# EAGLE board led_driver_v1.1 (EAGLE 6.5.0)
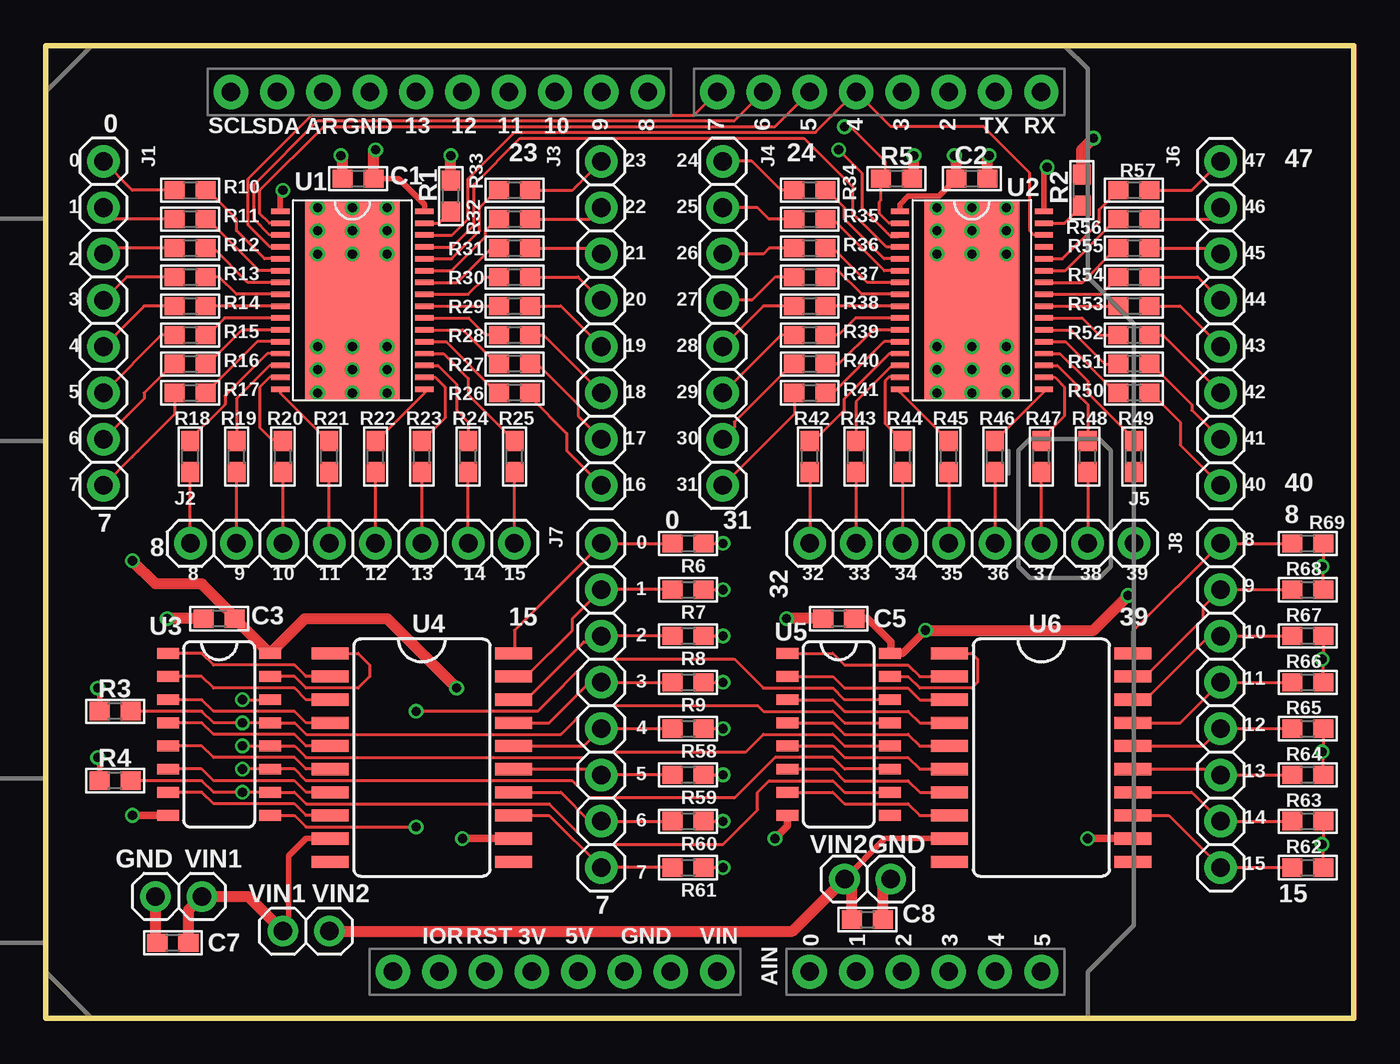
[diagram p0: board, top side]
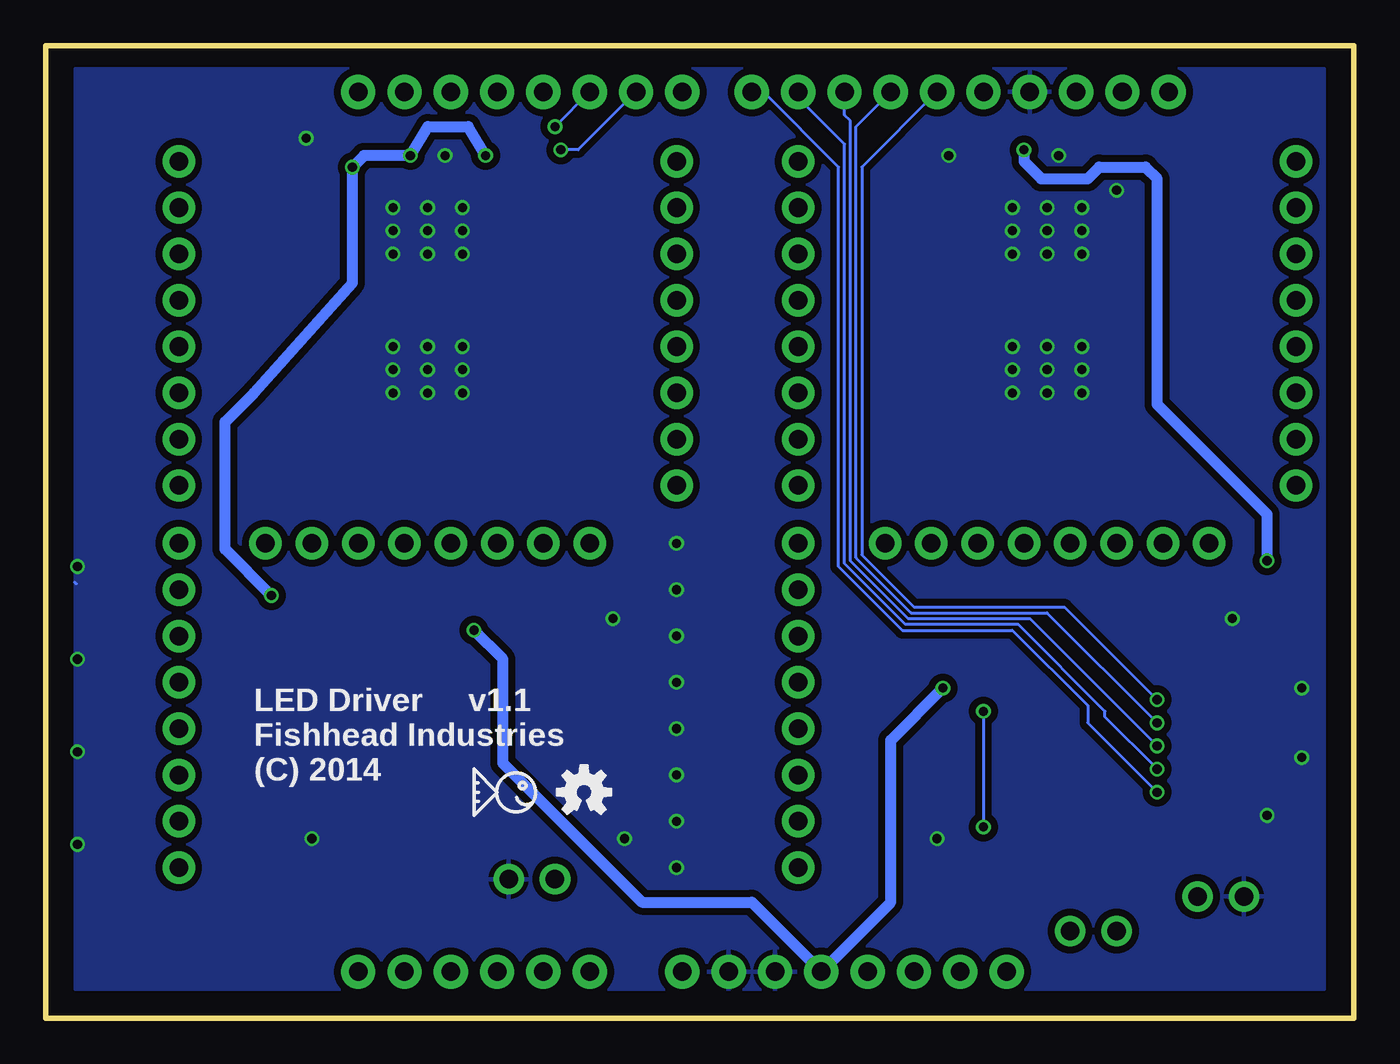
[diagram p1: board, bottom side, seen from below]

Size 71.75 x 53.34 mm. Coordinates in mm from the lower left corner, seen from the top.
Outline: 0,0 71.75,0 71.75,53.34 0,53.34 0,0
Copper layers (1*16): Top 0.035mm / dielectric 1.5mm / Bottom 0.035mm
Design rules "Fusion_eagle_rule_v1.1_tms *": minimum track width 6mil, minimum drill 12mil, track to track 15mil, track to pad 15mil, pad to pad 6mil, via to via 10mil, smd to smd 0mil, copper to edge 15mil, drill to drill 15mil, minimum pad ring 10mil, minimum via ring 6mil, stop-mask expansion 2mil, vias tented up to drill 100mil, thermal gap 10mil

## Footprints (pad centres in the part's own frame; a part is rotated, then mirrored left to right if it is on the bottom)
C0603 = smd 1.1 x 1: 1 -0.85,0; 2 0.85,0
1X08 = drill 1.016 pad 1.778: 1 -8.89,0; 2 -6.35,0; 3 -3.81,0; 4 -1.27,0; 5 1.27,0; 6 3.81,0; 7 6.35,0; 8 8.89,0
1X02 = drill 1.016 pad 1.676: 1 -1.27,0; 2 1.27,0
0603-RES = smd 1.1 x 1: 1 -0.85,0; 2 0.85,0
HTSSOP32DAP = smd 0.3 x 1: 1 -4.875,-3.95; 2 -4.225,-3.95; 3 -3.575,-3.95; 4 -2.925,-3.95; 5 -2.275,-3.95; 6 -1.625,-3.95; 7 -0.975,-3.95; 8 -0.325,-3.95; 9 0.325,-3.95; 10 0.975,-3.95; 11 1.625,-3.95; 12 2.275,-3.95; 13 2.925,-3.95; 14 3.575,-3.95; 15 4.225,-3.95; 16 4.875,-3.95; 17 4.875,3.95; 18 4.225,3.95; 19 3.575,3.95; 20 2.925,3.95; 21 2.275,3.95; 22 1.625,3.95; 23 0.975,3.95; 24 0.325,3.95; 25 -0.325,3.95; 26 -0.975,3.95; 27 -1.625,3.95; 28 -2.275,3.95; 29 -2.925,3.95; 30 -3.575,3.95; 31 -4.225,3.95; 32 -4.875,3.95 | smd 11 x 5.2: EXP 0,0
SO16 = smd 0.6 x 1.2: 1 -4.445,-2.8; 2 -3.175,-2.8; 3 -1.905,-2.8; 4 -0.635,-2.8; 5 0.635,-2.8; 6 1.905,-2.8; 7 3.175,-2.8; 8 4.445,-2.8; 9 4.445,2.8; 10 3.175,2.8; 11 1.905,2.8; 12 0.635,2.8; 13 -0.635,2.8; 14 -1.905,2.8; 15 -3.175,2.8; 16 -4.445,2.8
SO20W = smd 0.66 x 2.032: 1 -5.715,-5.029; 2 -4.445,-5.029; 3 -3.175,-5.029; 4 -1.905,-5.029; 5 -0.635,-5.029; 6 0.635,-5.029; 7 1.905,-5.029; 8 3.175,-5.029; 9 4.445,-5.029; 10 5.715,-5.029; 11 5.715,5.029; 12 4.445,5.029; 13 3.175,5.029; 14 1.905,5.029; 15 0.635,5.029; 16 -0.635,5.029; 17 -1.905,5.029; 18 -3.175,5.029; 19 -4.445,5.029; 20 -5.715,5.029
UNO_R3_SHIELD = drill 1.016 pad 1.88: 3.3V 50.8,26.67; 5V 50.8,29.21; A0 50.8,41.91; A1 50.8,44.45; A2 50.8,46.99; A3 50.8,49.53; A4 50.8,52.07; A5 50.8,54.61; AREF 2.54,15.24; D2 2.54,49.53; D3 2.54,46.99; D4 2.54,44.45; D5 2.54,41.91; D6 2.54,39.37; D7 2.54,36.83; D8 2.54,33.02; D9 2.54,30.48; D10 2.54,27.94; D11 2.54,25.4; D12 2.54,22.86; D13 2.54,20.32; GND@0 50.8,31.75; GND@1 50.8,34.29; GND@2 2.54,17.78; IOREF 50.8,21.59; NC 50.8,19.05; RES 50.8,24.13; RX 2.54,54.61; SCL 2.54,10.16; SDA 2.54,12.7; TX 2.54,52.07; VIN 50.8,36.83

## Placement (x,y rotation side)
C1  .1uF  [C0603]  17.14,46.04 180 top
C2  .1uF  [C0603]  50.8,46.04 180 top
C3  .1uF  [C0603]  9.53,21.91 180 top
C5  .1uF  [C0603]  43.5,21.91 180 top
C7  10uF  [C0603]  6.99,4.13 180 top
C8  10uF  [C0603]  45.09,5.4 0 top
J1  [1X08]  3.17,38.1 270 top
J2  [1X08]  16.83,26.04 0 top
J3  [1X08]  30.48,38.1 90 top
J4  [1X08]  37.15,38.1 270 top
J5  [1X08]  50.8,26.04 0 top
J6  [1X08]  64.45,38.1 90 top
J7  [1X08]  30.48,17.14 90 top
J8  [1X08]  64.45,17.14 90 top
JP9  VSIN1  [1X02]  7.3,6.67 0 top
JP10  VSIN2  [1X02]  45.09,7.62 180 top
JP11  TIE  [1X02]  14.29,4.76 180 top
LOGO1  OSHW-LOGOS  [OSHW-LOGO-S]  42.23,12.38 0 bottom
R1  2.2K  [0603-RES]  22.23,45.09 90 top
R2  2.2K  [0603-RES]  56.83,45.4 90 top
R3  10K  [0603-RES]  3.81,16.83 180 top
R4  10K  [0603-RES]  3.81,13.02 180 top
R5  4.7K  [0603-RES]  46.67,46.04 180 top
R6  10K  [0603-RES]  35.24,26.04 0 top
R7  10K  [0603-RES]  35.24,23.5 0 top
R8  10K  [0603-RES]  35.24,20.95 0 top
R9  10K  [0603-RES]  35.24,18.41 0 top
R10  220  [0603-RES]  7.94,45.4 0 top
R11  220  [0603-RES]  7.94,43.81 0 top
R12  220  [0603-RES]  7.94,42.23 0 top
R13  220  [0603-RES]  7.94,40.64 0 top
R14  220  [0603-RES]  7.94,39.05 0 top
R15  220  [0603-RES]  7.94,37.47 0 top
R16  220  [0603-RES]  7.94,35.88 0 top
R17  220  [0603-RES]  7.94,34.29 0 top
R18  220  [0603-RES]  7.94,30.8 90 top
R19  220  [0603-RES]  10.48,30.8 90 top
R20  220  [0603-RES]  13.02,30.8 90 top
R21  220  [0603-RES]  15.56,30.8 90 top
R22  220  [0603-RES]  18.1,30.8 90 top
R23  220  [0603-RES]  20.64,30.8 90 top
R24  220  [0603-RES]  23.18,30.8 90 top
R25  220  [0603-RES]  25.72,30.8 90 top
R26  220  [0603-RES]  25.72,34.29 180 top
R27  220  [0603-RES]  25.72,35.88 180 top
R28  220  [0603-RES]  25.72,37.47 180 top
R29  220  [0603-RES]  25.72,39.05 180 top
R30  220  [0603-RES]  25.72,40.64 180 top
R31  220  [0603-RES]  25.72,42.23 180 top
R32  220  [0603-RES]  25.72,43.81 180 top
R33  220  [0603-RES]  25.72,45.4 180 top
R34  220  [0603-RES]  41.91,45.4 0 top
R35  220  [0603-RES]  41.91,43.81 0 top
R36  220  [0603-RES]  41.91,42.23 0 top
R37  220  [0603-RES]  41.91,40.64 0 top
R38  220  [0603-RES]  41.91,39.05 0 top
R39  220  [0603-RES]  41.91,37.47 0 top
R40  220  [0603-RES]  41.91,35.88 0 top
R41  220  [0603-RES]  41.91,34.29 0 top
R42  220  [0603-RES]  41.91,30.8 90 top
R43  220  [0603-RES]  44.45,30.8 90 top
R44  220  [0603-RES]  46.99,30.8 90 top
R45  220  [0603-RES]  49.53,30.8 90 top
R46  220  [0603-RES]  52.07,30.8 90 top
R47  220  [0603-RES]  54.61,30.8 90 top
R48  220  [0603-RES]  57.15,30.8 90 top
R49  220  [0603-RES]  59.69,30.8 90 top
R50  220  [0603-RES]  59.69,34.29 180 top
R51  220  [0603-RES]  59.69,35.88 180 top
R52  220  [0603-RES]  59.69,37.47 180 top
R53  220  [0603-RES]  59.69,39.05 180 top
R54  220  [0603-RES]  59.69,40.64 180 top
R55  220  [0603-RES]  59.69,42.23 180 top
R56  220  [0603-RES]  59.69,43.81 180 top
R57  220  [0603-RES]  59.69,45.4 180 top
R58  10K  [0603-RES]  35.24,15.88 0 top
R59  10K  [0603-RES]  35.24,13.34 0 top
R60  10K  [0603-RES]  35.24,10.79 0 top
R61  10K  [0603-RES]  35.24,8.26 0 top
R62  10K  [0603-RES]  69.22,8.26 0 top
R63  10K  [0603-RES]  69.22,10.79 0 top
R64  10K  [0603-RES]  69.22,13.34 0 top
R65  10K  [0603-RES]  69.22,15.88 0 top
R66  10K  [0603-RES]  69.22,18.41 0 top
R67  10K  [0603-RES]  69.22,20.95 0 top
R68  10K  [0603-RES]  69.22,23.5 0 top
R69  10K  [0603-RES]  69.22,26.04 0 top
U1  TLC5947DAP  [HTSSOP32DAP]  16.83,39.37 270 top
U2  TLC5947DAP  [HTSSOP32DAP]  50.8,39.37 270 top
U3  74LS595D  [SO16]  9.53,15.56 270 top
U4  UDN2982SLW  [SO20W]  20.64,14.29 270 top
U5  74LS595D  [SO16]  43.5,15.56 270 top
U6  UDN2982SLW  [SO20W]  54.61,14.29 270 top
U7  ARDUINO_R3_SHIELD  [UNO_R3_SHIELD]  0,53.34 270 top
U$1  FHI_LOGO  [FHI_LOGO]  46.99,12.38 0 bottom

## Library data of the parts
C1-C3 C5 C7 C8 J1-J8 JP9-JP11 R1-R69 U1 U2 U4 U6 U7 U$1 = CyberRailGuru
LOGO1 = SparkFun-Aesthetics
U3 U5 = CyberRailGuru; PROD_ID: IC-07875

## Nets
COL0: J7.8 R6.1 U4.20
COL1: J7.7 R7.1 U4.19
COL2: J7.6 R8.1 U4.18
COL3: J7.5 R9.1 U4.17
COL4: J7.4 R58.1 U4.16
COL5: J7.3 R59.1 U4.15
COL6: J7.2 R60.1 U4.14
COL7: J7.1 R61.1 U4.13
COL8: J8.8 R69.1 U6.20
COL9: J8.7 R68.1 U6.19
COL10: J8.6 R67.1 U6.18
COL11: J8.5 R66.1 U6.17
COL12: J8.4 R65.1 U6.16
COL13: J8.3 R64.1 U6.15
COL14: J8.2 R63.1 U6.14
COL15: J8.1 R62.1 U6.13
COL_CLEAR*: R4.1 U3.10 U5.10 U7.D8
COL_CLOCK: U3.11 U5.11 U7.D9
COL_DATA: U3.14 U7.D12
COL_DATA_CASCADE_1: U3.9 U5.14
COL_LATCH: U3.12 U5.12 U7.D10
COL_OE*: R3.1 U3.13 U5.13 U7.D11
GND: C1.2 C2.2 C3.2 C5.2 C7.2 C8.2 JP9.1 JP10.1 R1.2 R2.2 R3.2 R4.2 R6.2 R7.2 R8.2 R9.2 R58.2 R59.2 R60.2 R61.2 R62.2 R63.2 R64.2 R65.2 R66.2 R67.2 R68.2 R69.2 U1.1 U1.EXP U2.1 U2.EXP U3.8 U4.12 U5.8 U6.12 U7.GND@0 U7.GND@1 U7.GND@2
N$1: U3.15 U4.1
N$2: U3.1 U4.2
N$3: U3.2 U4.3
N$4: U3.3 U4.4
N$5: U3.4 U4.5
N$6: U3.5 U4.6
N$7: U3.6 U4.7
N$8: U3.7 U4.8
N$9: J1.1 R10.1
N$10: U5.15 U6.1
N$11: U5.1 U6.2
N$12: U5.2 U6.3
N$13: U5.3 U6.4
N$14: U5.4 U6.5
N$15: U5.5 U6.6
N$16: U5.6 U6.7
N$17: U5.7 U6.8
N$19: J1.7 R16.1
N$20: J1.8 R17.1
N$21: J2.1 R18.1
N$22: J2.2 R19.1
N$23: J2.3 R20.1
N$24: J1.6 R15.1
N$25: J2.4 R21.1
N$26: J2.5 R22.1
N$27: J2.6 R23.1
N$28: R2.1 U2.31
N$29: J2.7 R24.1
N$30: J2.8 R25.1
N$31: J3.1 R26.1
N$32: J3.2 R27.1
N$33: J3.3 R28.1
N$34: J3.4 R29.1
N$35: R1.1 U1.31
N$36: J3.5 R30.1
N$37: J3.6 R31.1
N$38: J3.7 R32.1
N$39: J3.8 R33.1
N$40: J1.2 R11.1
N$41: J1.3 R12.1
N$42: J1.4 R13.1
N$43: J1.5 R14.1
N$44: J6.7 R56.1
N$45: J6.8 R57.1
N$46: J6.6 R55.1
N$47: J6.5 R54.1
N$48: J6.4 R53.1
N$49: J6.3 R52.1
N$50: J6.2 R51.1
N$51: J6.1 R50.1
N$52: J5.8 R49.1
N$53: J5.7 R48.1
N$54: J5.6 R47.1
N$55: J5.5 R46.1
N$56: J5.4 R45.1
N$57: J5.3 R44.1
N$58: J5.2 R43.1
N$59: J5.1 R42.1
N$60: J4.8 R41.1
N$61: J4.7 R40.1
N$62: J4.6 R39.1
N$63: J4.5 R38.1
N$64: J4.4 R37.1
N$65: J4.3 R36.1
N$66: J4.2 R35.1
N$67: J4.1 R34.1
ROW0: R10.2 U1.5
ROW1: R11.2 U1.6
ROW2: R12.2 U1.7
ROW3: R13.2 U1.8
ROW4: R14.2 U1.9
ROW5: R15.2 U1.10
ROW6: R16.2 U1.11
ROW7: R17.2 U1.12
ROW8: R18.2 U1.13
ROW9: R19.2 U1.14
ROW10: R20.2 U1.15
ROW11: R21.2 U1.16
ROW12: R22.2 U1.17
ROW13: R23.2 U1.18
ROW14: R24.2 U1.19
ROW15: R25.2 U1.20
ROW16: R26.2 U1.21
ROW17: R27.2 U1.22
ROW18: R28.2 U1.23
ROW19: R29.2 U1.24
ROW20: R30.2 U1.25
ROW21: R31.2 U1.26
ROW22: R32.2 U1.27
ROW23: R33.2 U1.28
ROW24: R34.2 U2.5
ROW25: R35.2 U2.6
ROW26: R36.2 U2.7
ROW27: R37.2 U2.8
ROW28: R38.2 U2.9
ROW29: R39.2 U2.10
ROW30: R40.2 U2.11
ROW31: R41.2 U2.12
ROW32: R42.2 U2.13
ROW33: R43.2 U2.14
ROW34: R44.2 U2.15
ROW35: R45.2 U2.16
ROW36: R46.2 U2.17
ROW37: R47.2 U2.18
ROW38: R48.2 U2.19
ROW39: R49.2 U2.20
ROW40: R50.2 U2.21
ROW41: R51.2 U2.22
ROW42: R52.2 U2.23
ROW43: R53.2 U2.24
ROW44: R54.2 U2.25
ROW45: R55.2 U2.26
ROW46: R56.2 U2.27
ROW47: R57.2 U2.28
ROW_CLEAR: R5.2 U1.2 U2.2 U7.D5
ROW_CLOCK: U1.3 U2.3 U7.D6
ROW_DATA: U1.4 U7.D7
ROW_DATA_CASCADE_1: U1.29 U2.4
ROW_LATCH: U1.30 U2.30 U7.D4
VCC: C1.1 C2.1 C3.1 C5.1 R5.1 U1.32 U2.32 U3.16 U5.16 U7.5V
VIN1: C7.1 JP9.2 JP11.2 U4.9
VIN2: C8.1 JP10.2 JP11.1 U6.9

## Tracks (layer width: path | path; a pad name or v marks a point on that pad's centre or on a via)
COL0
  Top 0.152: R6.1 J7.8 25.72,21.27 25.72,20.05 U4.20
COL1
  Top 0.152: U4.19 26.35,18.73 28.89,21.27 28.89,21.91 J7.7 R7.1
COL2
  Top 0.152: U4.18 26.35,17.46 29.53,20.64 30.16,20.64 J7.6 R8.1
COL3
  Top 0.152: U4.17 27.62,16.19 29.84,18.41 J7.5 R9.1
COL4
  Top 0.152: U4.16 29.53,14.92 J7.4 R58.1
COL5
  Top 0.152: U4.15 30.16,13.65 J7.3 R59.1
COL6
  Top 0.152: U4.14 28.26,12.38 29.84,10.79 J7.2 R60.1
COL7
  Top 0.152: U4.13 27.62,11.11 J7.1 R61.1
COL8
  Top 0.152: R69.1 J8.8 59.64,21.22 U6.20
COL9
  Top 0.152: R68.1 J8.7 63.5,22.54 63.5,21.91 60.33,18.73 U6.19
COL10
  Top 0.152: R67.1 J8.6 63.82,20.95 60.33,17.46 U6.18
COL11
  Top 0.152: R66.1 J8.5 62.23,16.19 U6.17
COL12
  Top 0.152: R65.1 J8.4 63.5,14.92 U6.16
COL13
  Top 0.152: R64.1 J8.3 64.14,13.65 U6.15
COL14
  Top 0.152: R63.1 J8.2 62.87,12.38 U6.14
COL15
  Top 0.152: R62.1 J8.1 61.59,11.11 U6.13
COL_CLEAR*  (via drill 0.5)
  Top 0.152: U5.10 43.81,12.38 43.18,13.02 39.69,13.02 39.05,12.38 39.05,11.43 37.15,9.53 29.84,9.53 27.62,11.75 14.29,11.75 13.65,12.38 U3.10 v10.79,12.38 9.21,12.38 8.57,13.02 R4.1
  Bottom 0.152: v10.79,12.38 14.61,16.19 14.61,17.14 18.73,21.27 24.77,21.27 28.26,24.77 28.26,46.67 32.38,50.8 U7.D8
COL_CLOCK  (via drill 0.5)
  Top 0.152: v10.79,13.65 U3.11 13.65,13.65 14.29,13.02 28.89,13.02 29.84,12.06 37.78,12.06 40.01,14.29 43.18,14.29 43.81,13.65 U5.11
  Bottom 0.152: v10.79,13.65 13.65,16.51 13.65,16.83 18.41,21.59 24.61,21.59 27.94,24.92 27.94,47.94 30.48,50.48 U7.D9
COL_DATA  (via drill 0.5)
  Top 0.152: v10.79,17.46 U3.14
  Bottom 0.152: U7.D12 26.99,46.67 26.99,25.4 24.13,22.54 15.88,22.54 v10.79,17.46
COL_DATA_CASCADE_1  (via drill 0.5)
  Top 0.152: U3.9 13.65,11.11 14.29,10.48 v20.32,10.48 | U5.14 43.81,17.46 43.18,18.1 39.37,18.1 37.78,19.68 29.84,19.68 26.99,16.83 v20.32,16.83
  Bottom 0.152: v20.32,16.83 v20.32,10.48
COL_LATCH  (via drill 0.5)
  Top 0.152: v10.79,14.92 U3.12 13.65,14.92 14.29,14.29 29.53,14.29 29.84,14.61 38.42,14.61 39.37,15.56 43.18,15.56 43.81,14.92 U5.12
  Bottom 0.152: U7.D10 27.94,49.53 27.62,49.21 27.62,25.08 24.45,21.91 17.78,21.91 v10.79,14.92
COL_OE*  (via drill 0.5)
  Top 0.152: U5.13 43.81,16.19 43.18,16.83 39.37,16.83 39.05,17.14 29.84,17.14 28.26,15.56 14.29,15.56 13.65,16.19 U3.13 v10.79,16.19 9.21,16.19 8.57,16.83 R3.1
  Bottom 0.152: U7.D11 27.3,48.9 27.3,25.24 24.29,22.23 16.83,22.23 v10.79,16.19
GND  (via drill 0.5)
  Top 0.152: 16.83,42.55 v14.92,44.45 | 6.03,4.23 C7.2 | R65.2 70.06,14.66 v70.01,14.61 70.06,14.55 R64.2 | R63.2 70.06,9.58 v70.01,9.53 70.06,9.47 R62.2 | R66.2 70.06,19.63 v70.01,19.68 70.06,19.74 R67.2 | R68.2 70.06,24.71 v70.01,24.77 70.06,24.82 R69.2 | R61.2 v37.15,8.26 | R60.2 v37.15,10.79 | R59.2 v37.15,13.34 | R58.2 v37.15,15.88 | R9.2 v37.15,18.41 | R8.2 v37.15,20.95 | R7.2 v37.15,23.5 | R6.2 v37.15,26.04
  Top 0.305: R4.2 2.96,14.19 v2.86,14.29 | R3.2 2.96,18 v2.86,18.1 | U1.1 12.88,45.26 v13.02,45.4 | U2.1 46.85,44.63 47.31,45.09 49,45.09 C2.2
  Top 0.406: U3.8 v4.76,11.11 | U4.12 v22.86,9.84 | U5.8 40.7,10.54 v40.01,9.84 | U6.12 v57.15,9.84
  Top 0.61: 6.03,4.23 JP9.1 | C8.2 45.94,7.2 JP10.1 | C5.2 v40.64,21.91 | C1.2 16.3,47.2 v16.19,47.31 | R1.2 v22.23,47.31 | C3.2 v6.67,21.91 | R2.2 56.83,47.62 v57.47,48.26 | C2.2 49.95,47.2 v49.85,47.31 | U2.EXP v50.8,41.91 | U1.EXP v16.83,41.91
  Bottom 0.152: 70.17,23.91 70.06,23.81
  other vias: 14.92,43.18 16.83,44.45 18.73,44.45 18.73,43.18 18.73,41.91 18.73,36.83 18.73,35.56 18.73,34.29 16.83,34.29 14.92,34.29 14.92,41.91 14.92,36.83 14.92,35.56 16.83,43.18 16.83,36.83 16.83,35.56 48.9,44.45 52.7,44.45 50.8,44.45 48.9,43.18 50.8,43.18 52.7,43.18 48.9,41.91 52.7,41.91 52.7,36.83 50.8,36.83 48.9,36.83 48.9,35.56 48.9,34.29 50.8,34.29 50.8,35.56 52.7,35.56 52.7,34.29
  pour Bottom: 1.59,52.07 70.17,52.07 70.17,1.59 1.59,1.59
N$1
  Top 0.152: U4.1 17.14,20 17.78,19.37 17.78,18.73 17.14,18.1 14.29,18.1 13.65,18.73 U3.15
N$2
  Top 0.152: U4.2 14.29,18.73 13.65,19.37 9.21,19.37 8.57,20 U3.1
N$3
  Top 0.152: U4.3 14.29,17.46 13.65,18.1 9.21,18.1 8.57,18.73 U3.2
N$4
  Top 0.152: U4.4 14.29,16.19 13.65,16.83 9.21,16.83 8.57,17.46 U3.3
N$5
  Top 0.152: U4.5 14.29,14.92 13.65,15.56 9.21,15.56 8.57,16.19 U3.4
N$6
  Top 0.152: U4.6 14.29,13.65 13.65,14.29 9.21,14.29 8.57,14.92 U3.5
N$7
  Top 0.152: U4.7 14.29,12.38 13.65,13.02 9.21,13.02 8.57,13.65 U3.6
N$8
  Top 0.152: U4.8 14.29,11.11 13.65,11.75 9.21,11.75 8.57,12.38 U3.7
N$9
  Top 0.152: R10.1 4.76,45.4 J1.1
N$10
  Top 0.152: U5.15 47.31,18.73 47.94,18.1 50.8,18.1 51.12,18.41 51.12,19.68 50.8,20 U6.1
N$11
  Top 0.152: U5.1 43.18,20 43.81,19.37 47.31,19.37 47.94,18.73 U6.2
N$12
  Top 0.152: U5.2 43.18,18.73 43.81,18.1 47.31,18.1 47.94,17.46 U6.3
N$13
  Top 0.152: U5.3 43.18,17.46 43.81,16.83 47.31,16.83 47.94,16.19 U6.4
N$14
  Top 0.152: U5.4 43.18,16.19 43.81,15.56 47.31,15.56 47.94,14.92 U6.5
N$15
  Top 0.152: U5.5 43.18,14.92 43.81,14.29 47.31,14.29 47.94,13.65 U6.6
N$16
  Top 0.152: U5.6 43.18,13.65 43.81,13.02 47.31,13.02 47.94,12.38 U6.7
N$17
  Top 0.152: U5.7 43.18,12.38 43.81,11.75 47.31,11.75 47.94,11.11 U6.8
N$19
  Top 0.152: J1.7 5.4,33.97 5.4,34.29 6.99,35.88 R16.1
N$20
  Top 0.152: J1.8 4.76,30.8 5.08,31.11 7.09,33.12 R17.1
N$21
  Top 0.152: J2.1 R18.1
N$22
  Top 0.152: J2.2 R19.1
N$23
  Top 0.152: J2.3 R20.1
N$24
  Top 0.152: J1.6 6.35,37.47 R15.1
N$25
  Top 0.152: J2.4 R21.1
N$26
  Top 0.152: J2.5 R22.1
N$27
  Top 0.152: J2.6 R23.1
N$28
  Top 0.152: R2.1 55.88,43.59 U2.31
N$29
  Top 0.152: J2.7 R24.1
N$30
  Top 0.152: J2.8 R25.1
N$31
  Top 0.152: R26.1 26.57,34.08 28.57,32.07 28.57,31.11 J3.1
N$32
  Top 0.152: R27.1 26.99,35.88 29.21,33.66 29.21,33.02 J3.2
N$33
  Top 0.152: R28.1 27.3,37.47 J3.3
N$34
  Top 0.152: R29.1 28.26,39.05 J3.4
N$35
  Top 0.152: U1.31 21.59,43.59 R1.1
N$36
  Top 0.152: R30.1 29.21,40.64 J3.5
N$37
  Top 0.152: R31.1 30.16,42.23 J3.6
N$38
  Top 0.152: R32.1 29.84,43.81 J3.7
N$39
  Top 0.152: R33.1 28.89,45.4 J3.8
N$40
  Top 0.152: R11.1 3.81,43.81 J1.2
N$41
  Top 0.152: R12.1 3.49,42.23 J1.3
N$42
  Top 0.152: R13.1 4.45,40.64 J1.4
N$43
  Top 0.152: R14.1 5.4,39.05 J1.5
N$44
  Top 0.152: R56.1 63.82,43.81 J6.7
N$45
  Top 0.152: R57.1 62.87,45.4 J6.8
N$46
  Top 0.152: R55.1 64.14,42.23 J6.6
N$47
  Top 0.152: R54.1 63.18,40.64 J6.5
N$48
  Top 0.152: R53.1 62.23,39.05 J6.4
N$49
  Top 0.152: R52.1 61.28,37.47 J6.3
N$50
  Top 0.152: R51.1 60.64,35.88 62.87,33.66 62.87,33.34 J6.2
N$51
  Top 0.152: R50.1 60.64,34.29 62.23,32.7 62.23,31.43 J6.1
N$52
  Top 0.152: J5.8 R49.1
N$53
  Top 0.152: R48.1 J5.7
N$54
  Top 0.152: J5.6 R47.1
N$55
  Top 0.152: R46.1 J5.5
N$56
  Top 0.152: R45.1 J5.4
N$57
  Top 0.152: R44.1 J5.3
N$58
  Top 0.152: R43.1 J5.2
N$59
  Top 0.152: R42.1 J5.1
N$60
  Top 0.152: R41.1 41.06,33.12 J4.8
N$61
  Top 0.152: R40.1 40.96,35.88 37.78,32.7 37.78,32.38 J4.7
N$62
  Top 0.152: R39.1 40.32,37.47 J4.6
N$63
  Top 0.152: R38.1 39.37,39.05 J4.5
N$64
  Top 0.152: R37.1 40.01,40.64 38.73,39.37 J4.4
N$65
  Top 0.152: R36.1 39.69,42.23 39.37,41.91 J4.3
N$66
  Top 0.152: R35.1 39.69,43.81 39.05,44.45 J4.2
N$67
  Top 0.152: R34.1 40.32,45.4 38.73,46.99 J4.1
ROW0
  Top 0.152: U1.5 12.01,41.65 10.48,43.18 10.48,43.81 8.89,45.4 R10.2
ROW1
  Top 0.152: U1.6 11.71,40.99 8.89,43.81 R11.2
ROW2
  Top 0.152: U1.7 11.09,40.34 9.21,42.23 R12.2
ROW3
  Top 0.152: U1.8 10.47,39.7 9.53,40.64 R13.2
ROW4
  Top 0.152: U1.9 R14.2
ROW5
  Top 0.152: U1.10 9.82,38.4 8.89,37.47 R15.2
ROW6
  Top 0.152: U1.11 10.76,37.74 9.21,36.2 9.11,36.2 R16.2
ROW7
  Top 0.152: R17.2 11.59,37.09 U1.12
ROW8
  Top 0.152: U1.13 12.16,36.45 9.84,34.13 9.84,33.66 7.94,31.75 R18.2
ROW9
  Top 0.152: U1.14 12.3,35.8 10.48,33.97 R19.2
ROW10
  Top 0.152: U1.15 12.29,35.15 11.75,34.61 11.75,32.38 12.38,31.75 12.91,31.75 R20.2
ROW11
  Top 0.152: U1.16 12.88,34.27 15.24,31.91 15.46,31.75 R21.2
ROW12
  Top 0.152: U1.17 20.78,34.27 18.26,31.75 18.2,31.75 R22.2
ROW13
  Top 0.152: U1.18 21.37,35.15 21.91,34.61 21.91,32.92 R23.2
ROW14
  Top 0.152: U1.19 21.51,35.8 22.54,34.77 22.54,33.34 23.18,32.7 R24.2
ROW15
  Top 0.152: U1.20 21.82,36.45 23.18,35.08 23.18,34.19 R25.2
ROW16
  Top 0.152: U1.21 21.96,37.09 24.77,34.29 R26.2
ROW17
  Top 0.152: U1.22 22.9,37.74 24.77,35.88 R27.2
ROW18
  Top 0.152: U1.23 23.2,38.4 24.13,37.47 R28.2
ROW19
  Top 0.152: U1.24 R29.2
ROW20
  Top 0.152: U1.25 23.18,39.7 24.13,40.64 R30.2
ROW21
  Top 0.152: U1.26 22.57,40.34 24.45,42.23 R31.2
ROW22
  Top 0.152: U1.27 22.26,40.99 24.13,42.86 24.13,43.18 24.77,43.81 R32.2
ROW23
  Top 0.152: U1.28 22.28,41.65 23.81,43.18 23.81,44.45 24.77,45.4 R33.2
ROW24
  Top 0.152: U2.5 45.98,41.65 43.81,43.81 43.81,44.45 42.86,45.4 R34.2
ROW25
  Top 0.152: U2.6 46,40.99 43.18,43.81 R35.2
ROW26
  Top 0.152: U2.7 45.06,40.34 43.18,42.23 R36.2
ROW27
  Top 0.152: U2.8 44.76,39.7 43.5,40.96 43.08,40.96 R37.2
ROW28
  Top 0.152: U2.9 R38.2
ROW29
  Top 0.152: U2.10 44.43,38.4 43.5,37.47 R39.2
ROW30
  Top 0.152: U2.11 45.37,37.74 43.5,35.88 R40.2
ROW31
  Top 0.152: U2.12 45.98,37.09 43.18,34.29 R41.2
ROW32
  Top 0.152: U2.13 46.29,36.45 43.81,33.97 43.81,33.34 42.12,31.65 R42.2
ROW33
  Top 0.152: U2.14 46.43,35.8 44.45,33.81 R43.2
ROW34
  Top 0.152: U2.15 46.26,35.15 46.04,34.92 46.04,32.6 R44.2
ROW35
  Top 0.152: U2.16 46.85,34.33 R45.2
ROW36
  Top 0.152: U2.17 54.75,34.33 R46.2
ROW37
  Top 0.152: U2.18 55.34,35.15 55.88,34.61 55.88,33.02 54.71,31.85 54.71,31.75 R47.2
ROW38
  Top 0.152: U2.19 55.49,35.8 56.52,34.77 56.52,34.29 57.15,33.66 R48.2
ROW39
  Top 0.152: U2.20 55.63,36.45 57.15,34.92 57.15,34.29 59.69,31.75 R49.2
ROW40
  Top 0.152: U2.21 55.93,37.09 58.74,34.29 R50.2
ROW41
  Top 0.152: U2.22 56.23,37.74 58.1,35.88 R51.2
ROW42
  Top 0.152: U2.23 56.85,38.4 57.78,37.47 R52.2
ROW43
  Top 0.152: U2.24 R53.2
ROW44
  Top 0.152: U2.25 57.9,39.7 R54.2
ROW45
  Top 0.152: 58.42,42.23 58.74,42.23 | U2.26 56.85,40.34 58.74,42.23 | 58.74,42.23 R55.2
ROW46
  Top 0.152: U2.27 55.92,40.99 58.74,43.81 R56.2
ROW47
  Top 0.152: 58.42,45.4 R57.2 57.78,44.35 57.78,43.66 55.77,41.65 U2.28
ROW_CLEAR  (via drill 0.5)
  Top 0.152: U1.2 12.29,43.59 11.75,44.13 11.75,45.4 15.24,48.9 40.01,48.9 U7.D5 | v43.81,48.9 44.13,48.9 46.04,46.99 46.04,46.14 R5.2 45.82,44.87 45.72,44.77 45.72,44.13 46.26,43.59 U2.2
  Bottom 0.152: U7.D5 v43.81,48.9
ROW_CLOCK  (via drill 0.5)
  Top 0.152: U2.3 46.77,42.86 46.35,42.86 44.77,44.45 44.77,46.35 v43.5,47.62 | U1.3 12.3,42.95 11.43,43.81 11.43,45.72 14.92,49.21 37.78,49.21 U7.D6
  Bottom 0.152: U7.D6 42.55,47.62 v43.5,47.62
ROW_DATA
  Top 0.152: U1.4 12.31,42.3 11.11,43.5 11.11,46.04 14.61,49.53 35.56,49.53 U7.D7
ROW_DATA_CASCADE_1
  Top 0.152: U1.29 22.29,42.3 23.5,43.5 23.5,45.72 26.04,48.26 41.59,48.26 44.29,45.56 44.29,44.13 46.13,42.3 U2.4
ROW_LATCH
  Top 0.152: U1.30 22.31,42.95 23.18,43.81 23.18,46.04 25.72,48.58 42.23,48.58 U7.D4 46.35,48.9 51.44,48.9 53.98,46.35 53.98,43.18 54.21,42.95 U2.30
VCC  (via drill 0.5)
  Top 0.305: U2.32 54.75,46.49 v54.93,46.67 | U1.32 20.78,44.63 19.37,46.04 C1.1
  Top 0.406: 18.1,46.14 C1.1 | 46.25,20.05 U5.16 | C5.1 45.09,21.91 46.35,20.64 46.35,20.06 U5.16 | U5.16 46.99,20 v48.26,21.27
  Top 0.61: 12.38,20.06 U3.16 | U3.16 12.28,20 C3.1 10.38,22.01 8.57,23.81 6.03,23.81 v4.76,25.08 | U3.16 14.23,21.91 18.73,21.91 v22.54,18.1 | C1.1 18,47.52 v18.1,47.62 | 51.75,46.14 C2.1 51.65,47.2 v51.75,47.31 | R5.1 47.62,46.14 v47.62,47.31 | v59.37,23.18 57.47,21.27 v48.26,21.27
  Bottom 0.61: v4.76,25.08 4.76,27.62 10.79,33.66 10.79,46.04 11.43,46.67 13.97,46.67 14.61,46.04 17.14,46.04 18.1,46.99 v18.1,47.62 | v47.62,47.31 48.58,48.9 50.8,48.9 v51.75,47.31 54.29,47.31 v54.93,46.67 54.93,40.32 60.33,34.29 61.91,32.7 61.91,25.72 v59.37,23.18 | v48.26,21.27 46.67,19.68 46.67,13.97 39.05,6.35 33.02,6.35 U7.5V 25.4,6.35 25.4,15.24 v22.54,18.1
VIN1
  Top 0.305: U4.9 14.29,9.84 13.34,8.89 13.34,5.08 JP11.2
  Top 0.61: C7.1 7.83,5.93 JP9.2 11.11,6.67 JP11.2
VIN2
  Top 0.305: U6.9 46.04,9.84 JP10.2
  Top 0.61: JP11.1 40.96,4.76 JP10.2 44.23,7.2 C8.1

## Text on the board
tNames: 0 | 0 | 23 | 23 | 24 | 24 | 47 | 47 | 1 | 22 | 25 | 46 | 21 | 26 | 45 | 2 | 3 | 20 | 27 | 44 | 4 | 19 | 28 | 43 | 5 | 18 | 29 | 42 | 6 | 17 | 30 | 41 | 7 | 16 | 31 | 40 | 40 | 7 | 0 | 31 | 8 | 8 | 0 | 8 | 8 | 9 | 10 | 11 | 12 | 13 | 14 | 15 | 32 | 32 | 33 | 34 | 35 | 36 | 37 | 38 | 39 | 15 | 1 | 39 | 9 | 2 | 10 | 3 | 11 | 4 | 12 | 5 | 13 | 14 | 6 | VIN2 | GND | GND | VIN1 | 7 | 15 | VIN1 | VIN2 | 7 | 15
bNames: v1.1 | LED Driver | Fishhead Industries | (C) 2014